# Altium PCB lab2_arhipov_buck.PcbDoc
Units mm, origin at the board's own origin, x right, y up, seen from the top; angles counter-clockwise.
Board outline 63 x 24.9 mm, 4 copper layers (Top Layer, Signal Layer 1, Signal Layer 2, Bottom Layer), stack 1.522 mm thick; 32 components, 16 nets, 82 pads, 15 vias.
Unrouted connection lines stored in the file: 13.
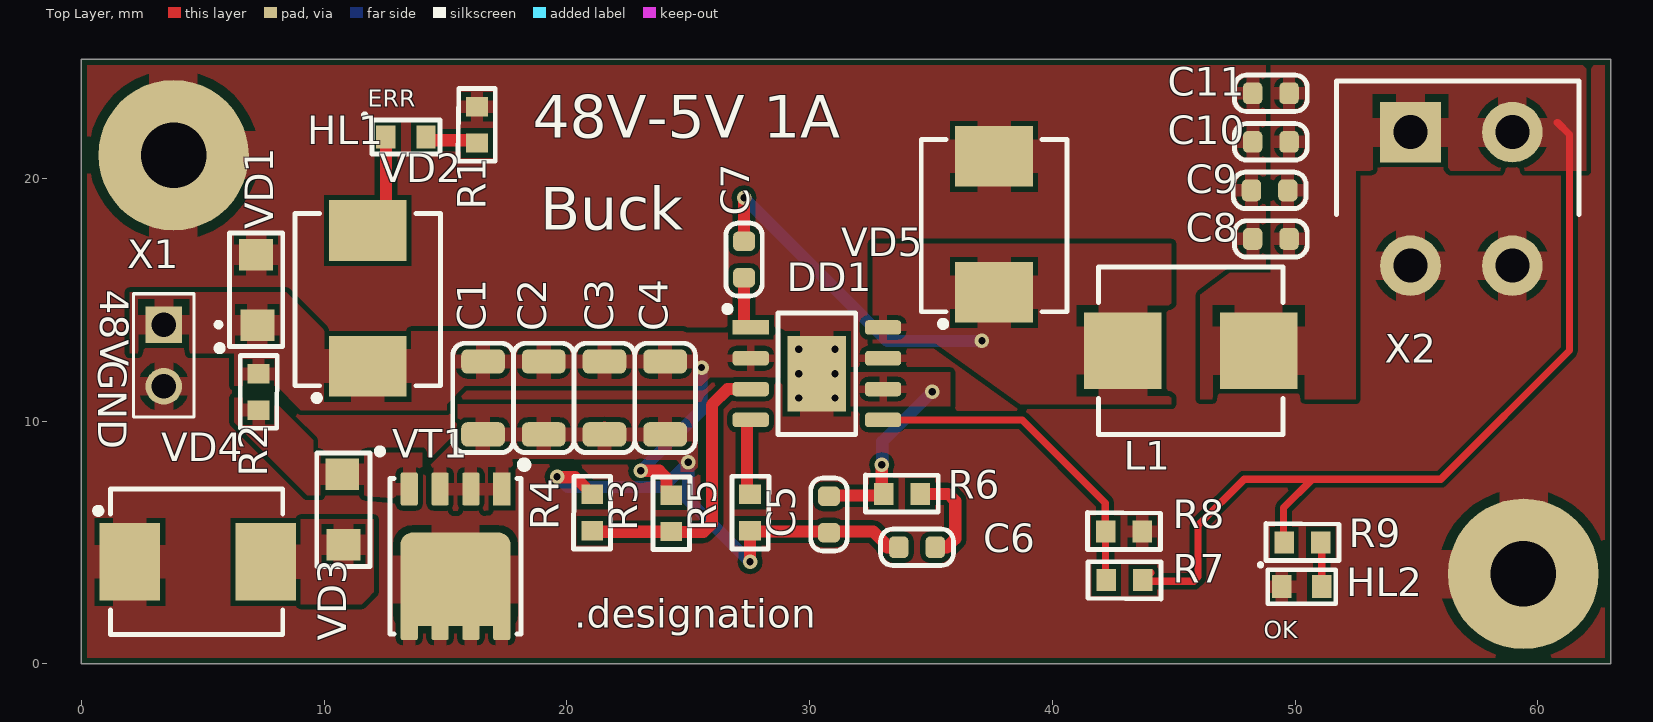
[diagram p0: Top Layer view]
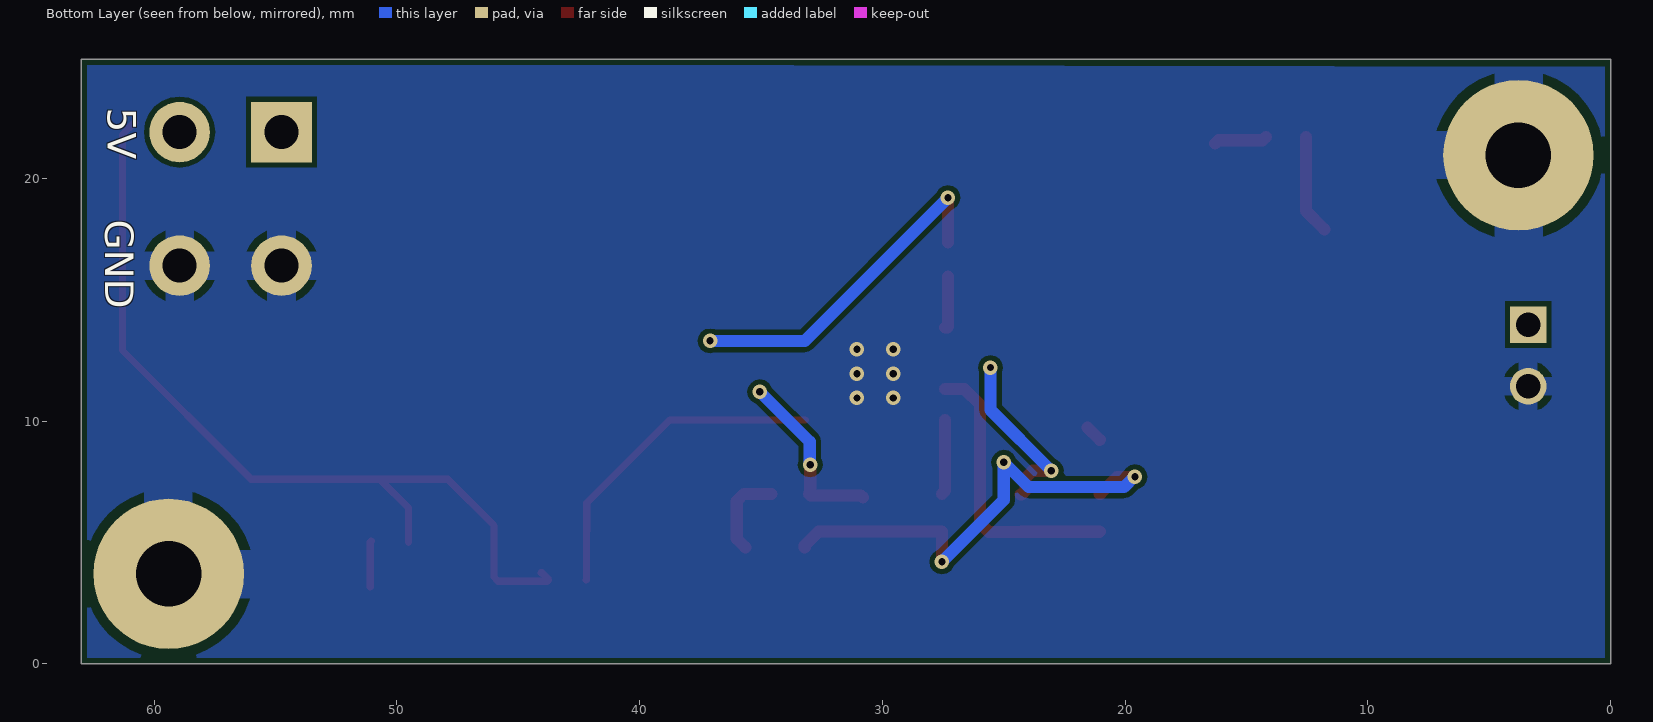
[diagram p1: Bottom Layer view, seen from below]
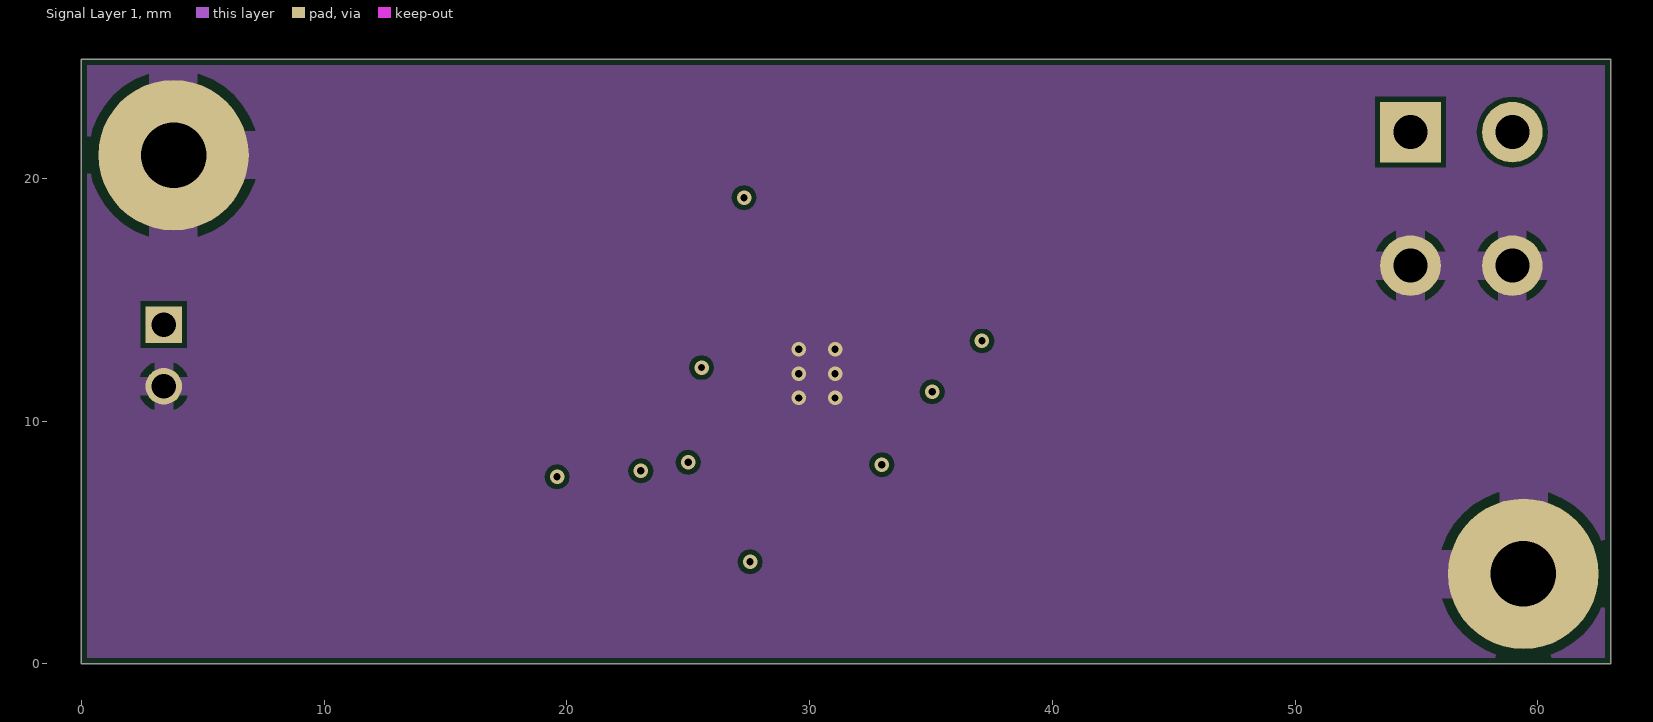
[diagram p2: Signal Layer 1]
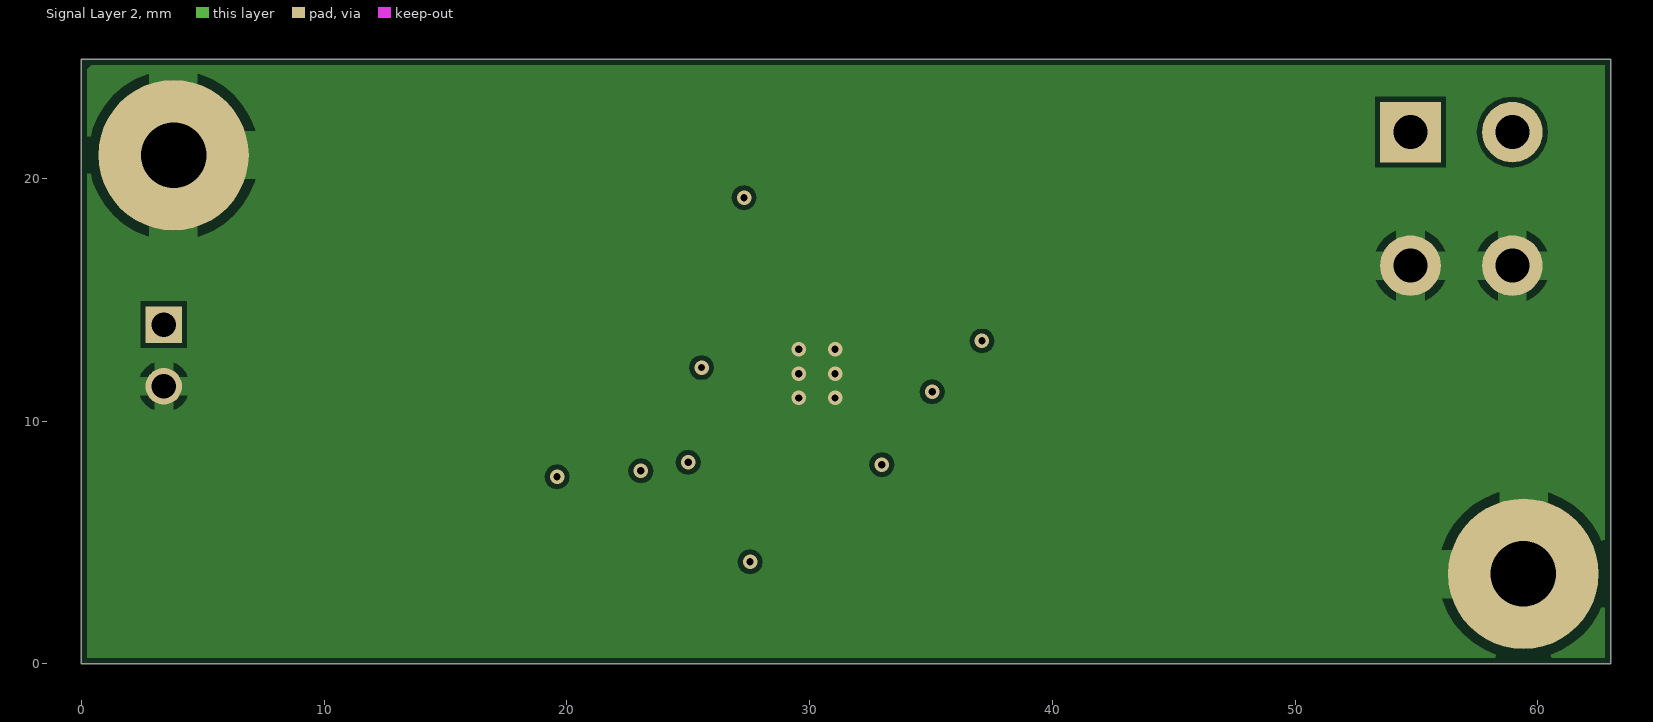
[diagram p3: Signal Layer 2]
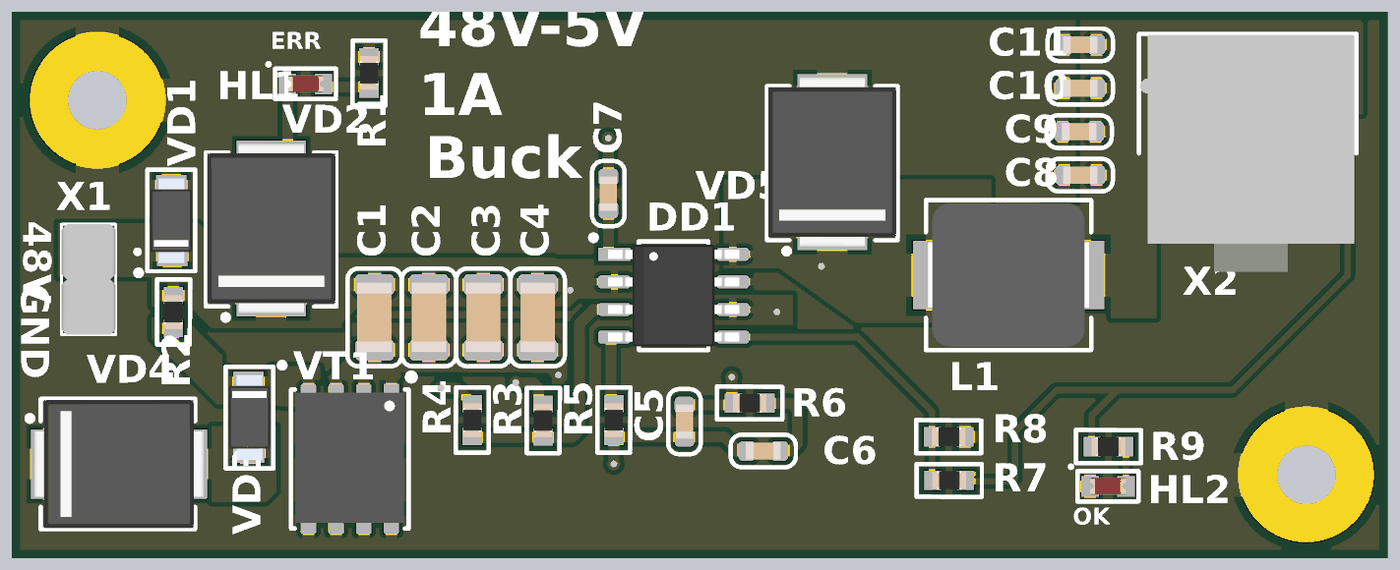
[diagram p4: 3D render of the assembled board from above, using the file's embedded part models]

## Layer stack, top to bottom
Top Solder: solder mask 0.0102, Solder Resist, Dk 3.5
Top Layer: signal copper 0.018
Prepreg 1: prepreg 0.125, FR4 HiTg170, Dk 5.07
Signal Layer 1: signal copper 0.018
Core 1: core 1.2, FR4, Dk 4.6
Signal Layer 2: signal copper 0.018
Prepreg 2: prepreg 0.125, FR4 HiTg170, Dk 5.07
Bottom Layer: signal copper 0.018
Bottom Solder: solder mask 0.0102, Solder Resist, Dk 3.5

## Board outline
0,0 0,24.9 63,24.9 63,0

## Design rules (kind name [scope] priority, off if disabled: settings)
AcuteAngle min_acute_angle [OnCopper] p1: minimum=3.50000000000000E+0001 checktracksonly=FALSE // Минимальный угол между примитивами топологии
BoardOutlineClearance board_outline_clearance_std [NOT (OnLayer('Bottom Overlay') OR OnLayer('Top Overlay'))] p1: gap=0.25 ignorepadtopadclearanceinfootprint=FALSE except(0: Arc-SplitContinuation Track-SplitContinuation SMDPad-SplitContinuation THPad-SplitContinuation Via-SplitContinuation Fill-SplitContinuation Poly-SplitContinuation Region-SplitContinuation Text-SplitContinuation) // Отступ элементов топологии от края фрезеруемой печатной платы
Clearance clearance_outer_18um_std [OnTopLayer OR OnBottomLayer] p1: gap=0.125 ignorepadtopadclearanceinfootprint=TRUE except(0.2: Arc-Fill Arc-Poly Track-Fill Track-Poly SMDPad-SMDPad SMDPad-Fill SMDPad-Poly THPad-Fill THPad-Poly Via-Fill Via-Poly Fill-Fill Fill-Poly Poly-Poly Poly-Region Poly-Text; 0.25: Arc-Hole Track-Hole SMDPad-Hole THPad-Hole Via-Hole Fill-Hole Poly-Hole Region-Hole Text-Hole) // Зазоры на внешних слоях
Clearance clearance_inner_18um_std [NOT (OnTopLayer Or OnBottomLayer)] p2: gap=0.125 ignorepadtopadclearanceinfootprint=FALSE except(0.2: Arc-Fill Arc-Poly Track-Fill Track-Poly SMDPad-SMDPad SMDPad-Fill SMDPad-Poly THPad-Fill THPad-Poly Via-Fill Via-Poly Fill-Fill Fill-Poly Poly-Poly Poly-Region Poly-Text; 0.25: Arc-Hole Track-Hole SMDPad-Hole THPad-Hole Via-Hole Fill-Hole Poly-Hole Region-Hole Text-Hole) // Зазоры на внутренних слоях
ComponentClearance [All] p1: gap=0 collisioncheckmode=3 verticalgap=0 showdistances=FALSE
DiffPairsRouting diff_pairs_routing [All] p1: maxlimit=0.254 minlimit=0.127 mostfreqgap=0.254 toplayer_maxgap=0.127 toplayer_prefgap=0.127 toplayer_minwidth=0.143 toplayer_maxwidth=0.143 toplayer_prefwidth=0.143 midlayer1_minwidth=0.381 midlayer1_maxwidth=0.381 midlayer1_prefwidth=0.381 midlayer2_minwidth=0.381 midlayer2_maxwidth=0.381 midlayer2_prefwidth=0.381 bottomlayer_maxgap=0.127 bottomlayer_prefgap=0.127 bottomlayer_minwidth=0.143 bottomlayer_maxwidth=0.143 bottomlayer_prefwidth=0.143 impedanceprofiledriven=TRUE impedanceprofileid={FD46899E-B5A2-4EF5-A302-5D2DB6A51F35} maxuncoupledlength=12.7 // Правила трассировки дифференциальных пар
HoleSize min_hole_size_std [IsPad] p1: absolutevalues=TRUE maxlimit=5.9 minlimit=0.6 maxpercent=80.000 minpercent=20.000 // Диаметр межслойного переходного отверстия
HoleSize min_hole_size_via_std [IsVia] p2: absolutevalues=TRUE maxlimit=5.9 minlimit=0.3 maxpercent=80.000 minpercent=20.000 // Минимальный диаметр монтажного отверстия
HoleToHoleClearance hole_to_hole_clearance_std [All] p1: gap=0.2 allowstackedmicrovias=FALSE // Минимальное расстояние между краями двух отверстий
MinimumAnnularRing min_via_ar_std [All] p1: minimumring=0.15 // Поясок площадки переходного отверстия (Annular ring VIA)
MinimumAnnularRing min_pad_ar_std [All] p2: minimumring=0.2 // Поясок монтажной контактной площадки (Annular ring PAD)
MinimumSolderMaskSliver min_solder_mask_bridge_std [All] p1: minsoldermaskwidth=0.15 // Мнимальная ширина масочного мостика
PlaneClearance plane_clearance_18um_std [All] p1: clearance=0.2 // Отступ полигона (для слоя plane) от элементов топологии
PlaneConnect [All] p1: planeconnectstyle=Relief reliefexpansion=0.5 reliefentries=4 reliefconductorwidth=0.2 reliefairgap=0.2
PolygonConnect poly_connect_to_pad<=0.3 [(AsMM(PadXSize_AllLayers)<=0.301) or (AsMM(PadYSize_AllLayers)<=0.301)] p1: thpad.connectstyle=Relief thpad.reliefconductorwidth=0.2 thpad.reliefentries=4 thpad.polygonreliefangle="90 Angle" thpad.airgapwidth=0.2 smdpad.connectstyle=Relief smdpad.reliefconductorwidth=0.2 smdpad.reliefentries=4 smdpad.polygonreliefangle="90 Angle" smdpad.airgapwidth=0.2 via.connectstyle=Direct via.reliefconductorwidth=0.254 via.reliefentries=4 via.polygonreliefangle="90 Angle" via.airgapwidth=0.254 // Правила подключения полигонов для падов от 0,3мм и меньше
PolygonConnect poly_connect_to_pad<=0.4 [(AsMM(PadXSize_AllLayers)<=0.401) or (AsMM(PadYSize_AllLayers)<=0.401)] p2: thpad.connectstyle=Relief thpad.reliefconductorwidth=0.26 thpad.reliefentries=4 thpad.polygonreliefangle="90 Angle" thpad.airgapwidth=0.2 smdpad.connectstyle=Relief smdpad.reliefconductorwidth=0.26 smdpad.reliefentries=4 smdpad.polygonreliefangle="90 Angle" smdpad.airgapwidth=0.2 via.connectstyle=Direct via.reliefconductorwidth=0.254 via.reliefentries=4 via.polygonreliefangle="90 Angle" via.airgapwidth=0.254 // Правила подключения полигонов для падов от 0,4 и меньше
PolygonConnect poly_connect_to_pad<=0.6 [(AsMM(PadXSize_AllLayers)<=0.601) or (AsMM(PadYSize_AllLayers)<=0.601)] p3: thpad.connectstyle=Relief thpad.reliefconductorwidth=0.33 thpad.reliefentries=4 thpad.polygonreliefangle="90 Angle" thpad.airgapwidth=0.2 smdpad.connectstyle=Relief smdpad.reliefconductorwidth=0.33 smdpad.reliefentries=4 smdpad.polygonreliefangle="90 Angle" smdpad.airgapwidth=0.2 via.connectstyle=Direct via.reliefconductorwidth=0.254 via.reliefentries=4 via.polygonreliefangle="90 Angle" via.airgapwidth=0.254 // Правила подключения полигонов для падов от 0,6мм и меньше
PolygonConnect poly_connect_to_pad<=0.7 [(AsMM(PadXSize_AllLayers)<=0.701) or (AsMM(PadYSize_AllLayers)<=0.701)] p4: thpad.connectstyle=Relief thpad.reliefconductorwidth=0.46 thpad.reliefentries=4 thpad.polygonreliefangle="90 Angle" thpad.airgapwidth=0.2 smdpad.connectstyle=Relief smdpad.reliefconductorwidth=0.46 smdpad.reliefentries=4 smdpad.polygonreliefangle="90 Angle" smdpad.airgapwidth=0.2 via.connectstyle=Direct via.reliefconductorwidth=0.254 via.reliefentries=4 via.polygonreliefangle="90 Angle" via.airgapwidth=0.254 // Правила подключения полигонов для падов от 0,7мм и меньше
PolygonConnect poly_connect_to_pad<=0.8 [(AsMM(PadXSize_AllLayers)<=0.8)or(AsMM(PadYSize_AllLayers)<=0.8)] p5: thpad.connectstyle=Relief thpad.reliefconductorwidth=0.53 thpad.reliefentries=4 thpad.polygonreliefangle="90 Angle" thpad.airgapwidth=0.3 smdpad.connectstyle=Relief smdpad.reliefconductorwidth=0.53 smdpad.reliefentries=4 smdpad.polygonreliefangle="90 Angle" smdpad.airgapwidth=0.2 via.connectstyle=Direct via.reliefconductorwidth=0.254 via.reliefentries=4 via.polygonreliefangle="90 Angle" via.airgapwidth=0.254 // Правила подключения полигонов для падов от 0,8мм и меньше
PolygonConnect poly_connect_to_pad<=1 [(AsMM(PadXSize_AllLayers)<=1.01)or(AsMM(PadYSize_AllLayers)<=1.01)] p6: thpad.connectstyle=Relief thpad.reliefconductorwidth=0.6 thpad.reliefentries=4 thpad.polygonreliefangle="90 Angle" thpad.airgapwidth=0.3 smdpad.connectstyle=Relief smdpad.reliefconductorwidth=0.6 smdpad.reliefentries=4 smdpad.polygonreliefangle="90 Angle" smdpad.airgapwidth=0.2 via.connectstyle=Direct via.reliefconductorwidth=0.254 via.reliefentries=4 via.polygonreliefangle="90 Angle" via.airgapwidth=0.254 // Правила подключения полигонов для падов от 1мм и меньше
PolygonConnect poly_connect_to_pad<=1.3 [(AsMM(PadXSize_AllLayers)<=1.31)or(AsMM(PadYSize_AllLayers)<=1.31)] p7: thpad.connectstyle=Relief thpad.reliefconductorwidth=0.66 thpad.reliefentries=4 thpad.polygonreliefangle="90 Angle" thpad.airgapwidth=0.3 smdpad.connectstyle=Relief smdpad.reliefconductorwidth=0.86 smdpad.reliefentries=4 smdpad.polygonreliefangle="90 Angle" smdpad.airgapwidth=0.2 via.connectstyle=Direct via.reliefconductorwidth=0.254 via.reliefentries=4 via.polygonreliefangle="90 Angle" via.airgapwidth=0.254 // Правила подключения полигонов для падов от 1,3мм и меньше
PolygonConnect poly_connect_to_pad<=1.6 [(AsMM(PadXSize_AllLayers)<=1.61)or(AsMM(PadYSize_AllLayers)<=1.61)] p8: thpad.connectstyle=Relief thpad.reliefconductorwidth=0.8 thpad.reliefentries=4 thpad.polygonreliefangle="90 Angle" thpad.airgapwidth=0.3 smdpad.connectstyle=Relief smdpad.reliefconductorwidth=1 smdpad.reliefentries=4 smdpad.polygonreliefangle="90 Angle" smdpad.airgapwidth=0.2 via.connectstyle=Direct via.reliefconductorwidth=0.254 via.reliefentries=4 via.polygonreliefangle="90 Angle" via.airgapwidth=0.254 // Правила подключения полигонов для падов от 1,6мм и меньше
PolygonConnect poly_connect_to_pad<=1.8 [(AsMM(PadXSize_AllLayers)<=1.8)or(AsMM(PadYSize_AllLayers)<=1.8)] p9: thpad.connectstyle=Relief thpad.reliefconductorwidth=1 thpad.reliefentries=4 thpad.polygonreliefangle="90 Angle" thpad.airgapwidth=0.3 smdpad.connectstyle=Relief smdpad.reliefconductorwidth=1.2 smdpad.reliefentries=4 smdpad.polygonreliefangle="90 Angle" smdpad.airgapwidth=0.2 via.connectstyle=Direct via.reliefconductorwidth=0.254 via.reliefentries=4 via.polygonreliefangle="90 Angle" via.airgapwidth=0.254 // Правила подключения полигонов для падов от 1,8мм и меньше
PolygonConnect poly_connect_to_pad<=2 [(AsMM(PadXSize_AllLayers)<=2.01)or(AsMM(PadYSize_AllLayers)<=2.01)] p10: thpad.connectstyle=Relief thpad.reliefconductorwidth=1.1 thpad.reliefentries=4 thpad.polygonreliefangle="90 Angle" thpad.airgapwidth=0.3 smdpad.connectstyle=Relief smdpad.reliefconductorwidth=1.4 smdpad.reliefentries=4 smdpad.polygonreliefangle="90 Angle" smdpad.airgapwidth=0.2 via.connectstyle=Direct via.reliefconductorwidth=0.254 via.reliefentries=4 via.polygonreliefangle="90 Angle" via.airgapwidth=0.254 // Правила подключения полигонов для падов от 2мм и меньше
PolygonConnect poly_connect_to_pad<=2.3 [(AsMM(PadXSize_AllLayers)<=2.31)or(AsMM(PadYSize_AllLayers)<=2.31)] p11: thpad.connectstyle=Relief thpad.reliefconductorwidth=1.2 thpad.reliefentries=4 thpad.polygonreliefangle="90 Angle" thpad.airgapwidth=0.3 smdpad.connectstyle=Relief smdpad.reliefconductorwidth=1.4 smdpad.reliefentries=4 smdpad.polygonreliefangle="90 Angle" smdpad.airgapwidth=0.2 via.connectstyle=Direct via.reliefconductorwidth=0.254 via.reliefentries=4 via.polygonreliefangle="90 Angle" via.airgapwidth=0.254 // Правила подключения полигонов для падов от 2,3мм и меньше
PolygonConnect poly_connect_to_pad<=2.5 [(AsMM(PadXSize_AllLayers)<=2.51)or(AsMM(PadYSize_AllLayers)<=2.51)] p12: thpad.connectstyle=Relief thpad.reliefconductorwidth=1.2 thpad.reliefentries=4 thpad.polygonreliefangle="90 Angle" thpad.airgapwidth=0.3 smdpad.connectstyle=Relief smdpad.reliefconductorwidth=1.4 smdpad.reliefentries=4 smdpad.polygonreliefangle="90 Angle" smdpad.airgapwidth=0.2 via.connectstyle=Direct via.reliefconductorwidth=0.254 via.reliefentries=4 via.polygonreliefangle="90 Angle" via.airgapwidth=0.254 // Правила подключения полигонов для падов от 2,5мм и меньше
PolygonConnect poly_connect_to_pad<=2.7 [(AsMM(PadXSize_AllLayers)<=2.71)or(AsMM(PadYSize_AllLayers)<=2.71)] p13: thpad.connectstyle=Relief thpad.reliefconductorwidth=1.4 thpad.reliefentries=4 thpad.polygonreliefangle="90 Angle" thpad.airgapwidth=0.3 smdpad.connectstyle=Relief smdpad.reliefconductorwidth=1.6 smdpad.reliefentries=4 smdpad.polygonreliefangle="90 Angle" smdpad.airgapwidth=0.2 via.connectstyle=Direct via.reliefconductorwidth=0.254 via.reliefentries=4 via.polygonreliefangle="90 Angle" via.airgapwidth=0.254 // Правила подключения полигонов для падов от 2,7мм и меньше
PolygonConnect poly_connect_to_pad<=3 [(AsMM(PadXSize_AllLayers)<=3.01)or(AsMM(PadYSize_AllLayers)<=3.01)] p14: thpad.connectstyle=Relief thpad.reliefconductorwidth=1.6 thpad.reliefentries=4 thpad.polygonreliefangle="90 Angle" thpad.airgapwidth=0.3 smdpad.connectstyle=Relief smdpad.reliefconductorwidth=1.8 smdpad.reliefentries=4 smdpad.polygonreliefangle="90 Angle" smdpad.airgapwidth=0.2 via.connectstyle=Direct via.reliefconductorwidth=0.254 via.reliefentries=4 via.polygonreliefangle="90 Angle" via.airgapwidth=0.254 // Правила подключения полигонов для падов от 3мм и меньше
PolygonConnect poly_connect_to_pad<=7 [(AsMM(PadXSize_AllLayers)<7.01)or(AsMM(PadYSize_AllLayers)<=7.01)] p15: thpad.connectstyle=Relief thpad.reliefconductorwidth=2 thpad.reliefentries=4 thpad.polygonreliefangle="90 Angle" thpad.airgapwidth=0.4 smdpad.connectstyle=Relief smdpad.reliefconductorwidth=2 smdpad.reliefentries=4 smdpad.polygonreliefangle="90 Angle" smdpad.airgapwidth=0.3 via.connectstyle=Direct via.reliefconductorwidth=0.254 via.reliefentries=4 via.polygonreliefangle="90 Angle" via.airgapwidth=0.254 // Правила подключения полигонов для падов от 7мм и меньше
PolygonConnect poly_connect_to_pad [All] p16: thpad.connectstyle=Relief thpad.reliefconductorwidth=0.25 thpad.reliefentries=4 thpad.polygonreliefangle="90 Angle" thpad.airgapwidth=0.2 smdpad.connectstyle=Relief smdpad.reliefconductorwidth=0.25 smdpad.reliefentries=4 smdpad.polygonreliefangle="90 Angle" smdpad.airgapwidth=0.2 via.connectstyle=Direct via.reliefconductorwidth=0.25 via.reliefentries=4 via.polygonreliefangle="90 Angle" via.airgapwidth=0.2 // Правила подключения полигонов общие
RoutingCorners [All] p1 off: cornerstyle=45-Degree minsetback=2.5 maxsetback=2.5
RoutingVias [All] p1: holewidth=0.3 width=0.6 viastyle="Through Hole" minholewidth=0.3 minwidth=0.6 maxholewidth=5.9 maxwidth=6.4
SilkToSilkClearance silk_to_silk_clearance_std [All] p1 off: silktosilkclearance=0.15 // Отступ текста шелкографии от других примитивов шелкографии
SilkToSolderMaskClearance silk_to_solder_mask_clearance_std [IsPad] p1 off: minsilkscreentomaskgap=0.15 clearancetoexposedcopper=FALSE // Минимальное расстояние между элементами шелкографии и вскрытой медью
SolderMaskExpansion solder_mask_expansion_std [All] p1: expansion=0.05 // Припуск паяльной масски
UnRoutedNet [All] p1: checkbadconnections=TRUE
Width width_18um_std [All] p1: maxlimit=10 minlimit=0.125 preferedwidth=0.15 checkconnectedcopper=TRUE // Ширина проводников (общая)
19 further rules are at their usual default settings.

## Components (designator, comment, footprint, x,y, rotation, side; value= is the part's Value field where it differs from the comment)
C1 "2,2 мк" C1206 16.55,10.95 r270 top
C2 "2,2 мк" C1206 19.05,10.95 r270 top
C3 "2,2 мк" C1206 21.55,10.95 r270 top
C4 "2,2 мк" C1206 24.05,10.95 r270 top
C5 "100" C0603 30.8,6.15 r270 top
C6 "0,033 мк" C0603 34.425,4.8 r180 top
C7 "0,1 мк" C0603 27.3,16.65 r90 top
C8 "22 мк" C0603 49,17.5 r180 top
C9 "22 мк" C0603 48.95,19.5 r180 top
C10 "22 мк" C0603 49,21.5 r180 top
C11 "22 мк" C0603 49,23.5 r180 top
DD1 "TPS54560BDDA" HSOP-8 30.3,11.95 r0 top
HL1 "TLMS1000-GS08" HL0603 13.375,21.7 r0 top
HL2 "TLMS1000-GS08" HL0603 50.275,3.175 r0 top
L1 "SRP7028A-220M" SRP-2-670X660X280 45.7,12.9 r0 top
R1 "3,3 к" R0603 16.3,22.2 r270 top
R2 "680" R0603 7.3,11.2 r90 top
R3 "147 к" R0603 24.3,6.2 r90 top
R4 "4,42 к" R0603 21.05,6.225 r270 top
R5 "97,6 к" R0603 27.55,6.225 r90 top
R6 "3,6 к" R0603 33.8,7 r180 top
R7 "53,6 к" R0603 42.975,3.45 r0 top
R8 "10,2 к" R0603 42.95,5.45 r180 top
R9 "220" R0603 50.3,5 r180 top
VD1 "BZD17C47P" DO-219AB 7.2,15.4 r90 top
VD2 "SS36-E3/57T" DO-214AB 11.8,15.05 r90 top
VD3 "BZD17C15P" DO-219AB 10.8,6.35 r270 top
VD4 "SS36-E3/57T" DO-214AB 4.8,4.2 r0 top
VD5 "SS36-E3/57T" DO-214AB 37.6,18.1 r90 top
VT1 "CSD19532Q5B" SON-8 15.415,4.43 r180 top
X1 "826629-2" TE_826629-2 3.4,12.7 r270 top
X2 "4-1775099-0" 4-1775099-0 56.7,18.5 r0 top

## Footprints (in the part's own frame and the unit in brackets; to place one, negate y for a bottom-side part, rotate by r counter-clockwise, add the part's x,y. Pads: shape width x height; smd on the part's side, far side on the other; paste and mask are expansions set on the pad)
4-1775099-0 [mm]
  rect 2.5x2.5 hole 1.4: 1(-1.95,3.4)
  round 2.5 hole 1.4: 2(2.25,3.4) 3(-1.95,-2.1) 4(2.25,-2.1)
  silkscreen extent -5,0 5,5.5, body extent -4.95,-5.45 4.9,5.45, height 12.8
C0603 [mm] "Chip Capacitor, 2-Leads, Body 1,60x0,80mm, IPC Medium Density"
  rrect50% 0.8x0.9 smd: 1(-0.75,0) 2(0.75,0)
  silkscreen extent -1.5,-0.75 1.5,0.75, body extent -0.8,-0.4 0.8,0.4, height 0.8
C1206 [mm] "Chip Capacitor, 2-Leads, Body 3,20x1,60mm, IPC Medium Density"
  rrect50% 1x1.8 smd: 1(-1.5,0) 2(1.5,0)
  silkscreen extent -2.25,-1.25 2.25,1.25, body extent -1.6,-0.8 1.6,0.8, height 0.78
DO-214AB [mm] "Molded Diode, 2-Leads, Body 7,94x5,91mm, IPC Medium Density"
  rect 2.5x3.2 smd: 1(-2.8,0) 2(2.8,0)
  silkscreen extent -4.22,-3 3.5,3, body extent -3.95,-2.95 3.95,2.95, height 2.59
DO-219AB [mm]
  rect 1.3x1.4 smd: 1(-1.45,-0.05) 2(1.45,0)
  silkscreen extent -2.45,-1.1 2.35,1.55, body extent -1.95,-0.95 1.95,0.95, height 1.25
HL0603 [mm] "Chip Diode, 2-Leads, Body 1,60x0,80mm, IPC Medium Density"
  rect 0.8x0.95 smd: 1(-0.825,0) 2(0.825,0)
  silkscreen extent -1.75,-0.7 1.4,0.95, body extent -0.81,-0.4 0.81,0.4, height 0.6
HSOP-8 [mm] "SOP, 8-Leads, Body 4,90x3,90mm, Pitch 1,27mm, Thermal Pad 3,10x2,40mm, IPC Medium Density"
  rect 2.4x3.1 smd: 0(0,0)
  rect 1.5x0.6 smd: 1(-2.725,1.905)
  rrect50% 1.5x0.6 smd: 2(-2.725,0.635) 3(-2.725,-0.635) 4(-2.725,-1.905) 5(2.725,-1.905) 6(2.725,-0.635) 7(2.725,0.635) 8(2.725,1.905)
  silkscreen extent -3.81,-2.5 1.6,2.79, body extent -3.01,-2.35 3.01,2.35, height 1.7
R0603 [mm] "Chip Resistor, 2-Leads, Body 1,60x0,80mm, IPC Medium Density"
  rect 0.8x0.9 smd: 1(-0.75,0) 2(0.75,0)
  silkscreen extent -1.5,-0.77 1.5,0.75, body extent -0.77,-0.43 0.78,0.43, height 0.43
SON-8 [mm]
  rrect25% 0.71x1.372 smd paste-10: D(-1.905,2.77) D(-0.635,2.77) D(0.635,2.77) D(1.905,2.77)
  rrect25% 4.52x3.85 smd paste-10: D(0,0.95)
  rrect25% 0.71x1.372 smd paste-0.002: G(1.905,-2.77) S(-0.635,-2.77) S(0.635,-2.77)
  rect 0.71x1.372 smd paste-0.002: S(-1.905,-2.77)
  silkscreen extent -2.83,-3.78 2.7,3.2, body extent -2.48,-3.05 2.52,2.95, height 1.05
SRP-2-670X660X280 [mm] "Precision Wire Wound Inductor, 2-Leads, Body 7,30x6,60mm, IPC Medium Density"
  rect 3.2x3.15 smd: 1(-2.8,0) 2(2.8,0)
  silkscreen extent -3.8,-3.45 3.8,3.45, body extent -3.7,-3.3 3.7,3.3, height 3
TE_826629-2 [mm]
  rect 1.508x1.508 hole 1: 1(-1.27,0)
  round 1.508 hole 1: 2(1.27,0)
  silkscreen extent -2.54,-1.25 2.54,2.35, body extent -2.54,-1.25 2.54,1.25, height 9.49

## Part data
C1 C2 C3 C4: library part c0078, "=Описание", HelpURL=https://www.yageo.com/upload/media/product/productsearch/datasheet/mlcc/UPY-NP0X7R_MV_100-to-630V_22.pdf, ID=c0078, Корпус=1206, Наименование=CC1206KKX7R0BB225, Напряжение="100 В", Номинал="2,2 мк", Номинальное напряжение="100 В", Описание="Конденсатор чип 1206 2,2 мкФ 100 В ±10 %", Отклонение="±10 %", Производитель="YAGEO Corp.", Рабочие температуры="от –55 °С до +125 °С", Температурный коэффициент емкости=X7R, Фамилия=Ларионов
C5: library part c0044, "=Описание", HelpURL=https://www.murata.com/en-eu/products/productdetail?partno=GRM1885C1H101JA01%23, ID=c0044, Корпус=0603, Наименование=GRM1885C1H101JA01D, Напряжение="50 В", Номинал=100, Номинальное напряжение="50 В", Описание="Конденсатор чип 0603 100 пФ 50 В ±5 %", Отклонение="±5 %", Производитель="Murata Manufacturing Co., Ltd.", Рабочие температуры="от -55 °С до +125 °С", Фамилия=Архипов
C6: library part c0027, "=Описание", HelpURL=https://www.yageo.com/upload/media/product/productsearch/datasheet/mlcc/UPY-GPHC_X7R_6.3V-to-50V_20.pdf, ID=c0027, Корпус=0603, Наименование=CC0603JPX7R7BB333, Напряжение="16 В", Номинал="0,033 мк", Номинальное напряжение="16 В", Описание="Конденсатор чип 0603 33 нФ 16 В ±5 %", Отклонение="±5 %", Производитель="YAGEO Corp.", Рабочие температуры="от –55 °С до +125 °С", Температурный коэффициент емкости=X7R, Фамилия=Ларионов
C7: library part c0018, "=Описание", HelpURL=https://www.yageo.com/upload/media/product/products/datasheet/mlcc/UPY-GPHC_X7R_6.3V-to-50V_20.pdf, ID=c0018, Корпус=0603, Наименование=CC0603JRX7R9BB104, Напряжение="50 В", Номинал="0,1 мк", Номинальное напряжение="50 В", Описание="Конденсатор чип 0603 0,1 мкФ 50 В ±5 %", Отклонение="±5 %", Производитель="YAGEO Corp.", Рабочие температуры="от -55 °С до +125 °С", Фамилия=Ларионов
C8 C9 C10 C11: library part c0101, "=Описание", HelpURL=https://www.yageo.com/upload/media/product/productsearch/datasheet/mlcc/UPY-GPHC_X5R_4V-to-50V_26.pdf, ID=c0101, Корпус=0603, Наименование=CC0603MPX5R6BB226, Напряжение="10 В", Номинал="22 мк", Номинальное напряжение="10 В", Описание="Конденсатор чип 0603 22 мкФ 10 В ±20 %", Отклонение="±20 %", Производитель="YAGEO Corp.", Рабочие температуры="от –55 °С до +85 °С", Температурный коэффициент емкости=X5R, Фамилия=Чернов
DD1: library part dd0009, "=Описание", HelpURL=https://www.ti.com/product/TPS54560B, ID=dd0009, Входное напряжение="от 4,5 В до 60 В", Выходное напряжение="от 1 В до 58,8 В", Коммутируемый ток="от 0 А до 5 А", Корпус=HSOP-8, Наименование=TPS54560BDDA, Описание="Понижающий преобразователь напряжения 60 В и 5 А", Производитель="Texas Instruments", Рабочие температуры="от –40 °С до +150 °С", Фамилия=Архипов, Частота переключения="от 100 кГц до 2,5 МГц"
HL1 HL2: library part hl0001, "=Описание", HelpURL=https://www.vishay.com/leds/list/product-83172/, ID=hl0001, Корпус=0603, Наименование=TLMS1000-GS08, Номинальная длина волны="628 нм", Номинальная сила света="4 мкд", Номинальное падение напряжения="1,8 В", Номинальный прямой ток="15 мА", Описание="Светодиод чип 0603 красный", Производитель="Vishay Intertechnology, Inc.", Рабочие температуры="от -40 °С до +100 °С", Рассеиваемая мощность="40 мВт", Фамилия=Ларионов, Цвет=Red
L1: library part l0006, "=Описание", HelpURL=https://www.bourns.com/products/magnetic-products/power-inductors-aec-q200-compliant/product/SRP7028A, ID=l0006, Индуктивность="22 мкГн", Корпус="6,7 x 6,6 x 2,8", Максимальное активное сопротивление="190 мОм", Наименование=SRP7028A-220M, Номинал="22 мкГн", Номинальное активное сопротивление="165 мОм", Номинальный ток (при нагреве на 20 °С/40 °С)="2 А", Описание="Катушка индуктивности 22 мкГн ±20 %", Отклонение="±20 %", Производитель="Bourns, Inc.", Рабочее напряжение="не указано", Рабочие температуры="от –55 °С до +150 °С", Резонансная частота="10 МГц", Ток насыщения="3,5 А", Фамилия=Ларионов
R1: library part r0025, "=Описание", HelpURL=https://www.yageo.com/upload/media/product/productsearch/datasheet/rchip/PYu-RC_Group_51_RoHS_L_11.pdf, ID=r0025, Корпус=0603, Наименование=RC0603FR-073K3L, Номинал="3,3 к", Номинальное напряжение="75 В", Номинальный ток="1 А", Описание="Резистор чип 0603 3,3 кОм ±1 % 0,1 Вт", Отклонение="±1 %", Производитель="YAGEO Corp.", Рабочие температуры="от -55 °С до +155 °С", Фамилия=Паньков
R2: library part r0028, "=Описание", HelpURL=https://www.yageo.com/upload/media/product/productsearch/datasheet/rchip/PYu-RC_Group_51_RoHS_L_11.pdf, ID=r0028, Корпус=0603, Наименование=RC0603JR-07680RL, Номинал=680, Номинальное напряжение="75 В", Номинальный ток="1 А", Описание="Резистор чип 0603 680 Ом ±1 % 0,1 Вт", Отклонение="±1 %", Производитель="YAGEO Corp.", Рабочие температуры="от –55 °С до +155 °С", Фамилия=Архипов
R3: library part r0102, "=Описание", HelpURL=https://www.yageo.com/upload/media/product/productsearch/datasheet/rchip/PYu-RC_Group_51_RoHS_L_11.pdf, ID=r0102, Корпус=0603, Наименование=RC0603FR-07147KL, Номинал="147 к", Номинальное напряжение="75 В", Номинальный ток="1 А", Описание="Резистор чип 0603 147 кОм ±1 % 0,1 Вт", Отклонение="±1 %", Производитель="YAGEO Corp.", Рабочие температуры="от –55 °С до +155 °С", Фамилия=Жернаков
R4: library part r0015, "=Описание", HelpURL=https://www.yageo.com/upload/media/product/productsearch/datasheet/rchip/PYu-RC_Group_51_RoHS_L_11.pdf, ID=r0015, Корпус=0603, Наименование=RC0603FR-074K42L, Номинал="4,42 к", Номинальное напряжение="75 В", Номинальный ток="1 А", Описание="Резистор чип 0603 4,42 кОм ±1 % 0,1 Вт", Отклонение="±1 %", Производитель="YAGEO Corp.", Рабочие температуры="от -55 °С до +155 °С", Фамилия=Жернаков
R5: library part r0029, "=Описание", HelpURL=https://www.yageo.com/upload/media/product/productsearch/datasheet/rchip/PYu-RC_Group_51_RoHS_L_11.pdf, ID=r0029, Корпус=0603, Наименование=RC0603FR-0797K6L, Номинал="97,6 к", Номинальное напряжение="75 В", Номинальный ток="1 А", Описание="Резистор чип 0603 97,6 кОм ±1 % 0,1 Вт", Отклонение="±1 %", Производитель="YAGEO Corp.", Рабочие температуры="от -55 °С до +155 °С", Фамилия=Водорезов
R6: library part r0026, "=Описание", HelpURL=https://www.yageo.com/upload/media/product/productsearch/datasheet/rchip/PYu-RC_Group_51_RoHS_L_11.pdf, ID=r0026, Корпус=0603, Наименование=RC0603FR-073K6L, Номинал="3,6 к", Номинальное напряжение="75 В", Номинальный ток="1 А", Описание="Резистор чип 0603 3,6 кОм ±1 % 0,1 Вт", Отклонение="±1 %", Производитель="YAGEO Corp.", Рабочие температуры="от -55 °С до +155 °С", Фамилия=Паньков
R7: library part r0017, "=Описание", HelpURL=https://www.yageo.com/upload/media/product/productsearch/datasheet/rchip/PYu-RC_Group_51_RoHS_L_11.pdf, ID=r0017, Корпус=0603, Наименование=RC0603BR-0753K6L, Номинал="53,6 к", Номинальное напряжение="75 В", Номинальный ток="1 А", Описание="Резистор чип 0603 53,6 кОм ±0,1 % 0,1 Вт", Отклонение="±0,1 %", Производитель="YAGEO Corp.", Рабочие температуры="от -55 °С до +155 °С", Фамилия=Жернаков
R8: library part r0014, "=Описание", HelpURL=https://www.yageo.com/upload/media/product/productsearch/datasheet/rchip/PYu-RC_Group_51_RoHS_L_11.pdf, ID=r0014, Корпус=0603, Наименование=RC0603FR-0710K2L, Номинал="10,2 к", Номинальное напряжение="75 В", Номинальный ток="1 А", Описание="Резистор чип 0603 10,2 кОм ±1 % 0,1 Вт", Отклонение="±1 %", Производитель="YAGEO Corp.", Рабочие температуры="от -55 °С до +155 °С", Фамилия=Жернаков
R9: library part r0009, "=Описание", HelpURL=https://www.yageo.com/upload/media/product/productsearch/datasheet/rchip/PYu-RC_Group_51_RoHS_L_11.pdf, ID=r0009, Корпус=0603, Наименование=RC0603FR-07220RL, Номинал=220, Номинальное напряжение="75 В", Номинальный ток="1 А", Описание="Резистор чип 0603 220 Ом ±1 % 0,1 Вт", Отклонение="±1 %", Производитель="YAGEO Corp.", Рабочие температуры="от -55 °С до +155 °С", Фамилия=Ларионов
VD1: library part vd0028, "=Описание", HelpURL=https://www.vishay.com/product?docid=85161, ID=vd0028, Корпус=DO-219AB, Наименование=BZD17C47P, Номинальное напряжение стабилизации="47 В", Номинальный ток стабилизации="10 мА", Описание="Стабилитрон 47 В", Производитель="Vishay Intertechnology, Inc.", Рабочие температуры="от –55 °С до +150 °С", Разброс напряжения стабилизации="44,0...50,0 В", Фамилия=Паньков
VD2 VD4 VD5: library part vd0004, "=Описание", HelpURL=https://www.vishay.com/product?docid=88751, ID=vd0004, Импульсное обратное напряжение="60 В", Корпус=DO-214AB, Макс допустимый средний прямой ток="3 А", Наименование=SS36-E3/57T, Описание="Диод Шоттки 60 В 3 А", Пиковое прямое напряжение="0,75 В", Производитель="Vishay Intertechnology, Inc.", Рабочие температуры="от –55 °С до +150 °С", Фамилия=Жернаков
VD3: library part vd0016, "=Описание", HelpURL=https://www.vishay.com/product?docid=85161, ID=vd0016, Корпус=DO-219AB, Наименование=BZD17C15P, Номинальное напряжение стабилизации="15 В", Номинальный ток стабилизации="50 мА", Описание="Стабилитрон 15 В", Производитель="Vishay Intertechnology, Inc.", Рабочие температуры="от –55 °С до +150 °С", Разброс напряжения стабилизации="13,8...15,6 В", Фамилия=Жернаков
VT1: library part vt0001, "=Описание", HelpURL=https://www.ti.com/product/CSD19532Q5B, ID=vt0001, Корпус=SON-8, Наименование=CSD19532Q5B, Напряжение затвор — исток="±20 В", Напряжение сток — исток="100 В", Описание="Транзистор полевой N-канальный 100 В 17 А", Производитель="Texas Instruments", Рабочие температуры="от –55 °С до +150 °С", Сопротивление сток — исток="0,0057 Ом", Ток стока="17 А", Фамилия=Жернаков
X1: Package=None, Availability=Unavailable, Centerline_Pitch="2.54 mm[.1 in]", Contact_1=+48V, Contact_2=GND, EU_RoHS_Compliance=Compliant, MF="TE Connectivity", MP=826629-2, Number_of_Positions=2, Price=None, Product_Type=Connector, SnapEDA_Link=https://www.snapeda.com/parts/826629-2/TE%20Connectivity%20AMP%20Connectors/view-part/494607/?ref=snap, TE_purchase_URL=https://www.te.com/usa-en/product-826629-2.html?te_bu=Cor&te_type=disp&te_campaign=seda_glo_cor-seda-global-disp-prtnr-fy19-seda-model-bom-cta_sma-317_1&elqCampaignId=32493
X2: library part x0004, "=Описание", Contact_1=5V, Contact_2=5V, Contact_3=GND, Contact_4=GND, HelpURL=https://www.te.com/usa-en/product-4-1775099-0.html, ID=x0004, Наименование=4-1775099-0, Описание="ATX Power 4 pin гнездо прямой", Производитель="TE Connectivity", Фамилия=Ларионов

## Free pads (board coordinates)
  round 6.2 hole 2.7: 2(3.8,20.95) 2(59.4,3.7)

## Via types
v1: diameter 0.6, hole 0.3, Top Layer to Bottom Layer, tented both sides, 9 vias
v2: diameter 0.6, hole 0.3, Top Layer to Bottom Layer, tented bottom, 6 vias

## Nets (pads, with @x,y where several pads share a name; then routed paths per layer and width w, separated by ;. In a path a pad name is that pad's centre, name@x,y a point inside that pad or via, vN(x,y) a via of type N, cw(c..) or ccw(c..) an arc to the next point about the centre after c; other vN are vias at no path point)
+5V: C8.1 C9.1 C10.1 C11.1 L1.2 R7.2 R9.2 X2.1 X2.2 | length 35.9
  Top Layer w0.3: R7.2@44.05,3.75 44.025,3.75 43.75,3.475 43.75,3.45 43.8,3.4 45.824,3.4 46,3.576 46,5.7 47.9,7.6 50.7,7.6 ; R9.2@49.525,5 49.525,6.425 50.7,7.6 ; 60.8,22.3 61.3,21.8 61.3,12.9 56,7.6 50.7,7.6
+48V: C1.1 C2.1 C3.1 C4.1 DD1.2 R2.2 R3.2 VD1.1 VD2.1 X1.1 | length 7.2
  Top Layer w0.5: v1(23.05,7.95) 23.807,7.95 24.1,7.657 24.1,7.15 24.275,6.975 R3.2@24.3,6.975
  Bottom Layer w0.5: v1(23.05,7.95) 25.55,10.45 v1(25.55,12.2)
BOOT: C7.1 DD1.1 | length 2.2
  Top Layer w0.5: C7.1@27.3,15.95 27.3,13.88 27.325,13.855 DD1.1@27.425,13.855
FB: DD1.5 R7.1 R8.2 | length 13.6
  Top Layer w0.3: DD1.5@33.175,10.045 38.755,10.045 42.175,6.625 42.175,5.45 42.188,5.438 42.188,3.463 R7.1@42.2,3.45
GND: C8.2 C9.2 C10.2 C11.2 DD1.0 DD1.7 HL2.1 pad.2 R1.1 R8.1 VD1.2 VD4.1 VD5.2 VT1.D X1.2 X2.3 X2.4
  other v2: 29.55,10.95 31.05,10.95 29.55,11.95 31.05,11.95 29.55,12.95 31.05,12.95
NetC1_2: C1.2 C2.2 C3.2 C4.2 C5.2 C6.2 R4.1 R5.1 VT1.S | length 20.8
  Top Layer w0.5: v1(19.6,7.7) 19.619,7.681 20.344,7.681 21.025,7 R4.1@21.05,7 ; C3.2@21.05,9.225 C3.2@21.55,9.725 ; v1(27.55,4.2) 27.55,5.45 30.8,5.45 32.625,5.45 33.2,4.875 33.2,4.8
  Bottom Layer w0.5: v1(19.6,7.7) 19.627,7.7 20.052,7.275 23.975,7.275 v1(25,8.3) 25,6.75 v1(27.55,4.2)
NetC5_1: C5.1 DD1.6 R6.2 | length 7.4
  Top Layer w0.5: C5.1@30.8,6.85 30.875,6.925 32.95,6.925 33.025,7 32.975,7.05 v1(32.975,8.2)
  Bottom Layer w0.5: v1(32.975,8.2) 32.994,8.219 32.994,9.144 v1(35.05,11.2)
NetC6_1: C6.1 R6.1 | length 3.6
  Top Layer w0.5: R6.1@34.575,7 35.707,7 36,6.707 36,5.15 35.65,4.8
NetDD1_3: DD1.3 R3.1 R4.2 | length 11.7
  Top Layer w0.5: R4.2@21.05,5.45 21.062,5.438 24.287,5.438 24.3,5.425 25.625,5.425 25.975,5.775 25.975,10.665 26.625,11.315 DD1.3@27.425,11.315
NetDD1_4: DD1.4 R5.2 | length 3.1
  Top Layer w0.5: DD1.4@27.425,10.045 27.425,7.125 R5.2@27.55,7
NetHL1_1: HL1.1 VD2.2 | length 4.1
  Top Layer w0.5: VD2.2@11.8,17.9 12.55,18.65 HL1.1
NetHL1_2: HL1.2 R1.2 | length 2.2
  Top Layer w0.5: HL1.2 14.337,21.563 16.163,21.563 R1.2@16.3,21.425
NetHL2_2: HL2.2 R9.1 | length 1.9
  Top Layer w0.3: R9.1@51.05,5.05 51.1,5 HL2.2
NetR2_1: R2.1 VD3.1 VT1.G
NetVD3_2: VD3.2 VD4.2
SW: C7.2 DD1.8 L1.1 VD5.1 | length 14.1
  Top Layer w0.5: C7.2@27.3,17.35 v1(27.3,19.2)
  Bottom Layer w0.5: v1(27.3,19.2) 33.2,13.3 v1(37.1,13.3)

## Polygon pours and split planes (outlines as drawn)
GND on Top Layer (solid, pour order 86): 0,24.9 0,0 63,0 63,24.9
SW on Top Layer "TP_SW_02" (solid, pour order 78): 32.6,13.2 32.6,17.3 44.9,17.3 44.9,10.7 38.68,10.7 35.6,12.9 35.18,13.2
NetVD3_2 on Top Layer "TP_VD3_01" (solid, pour order 54): 6.05,5.95 12.05,5.95 12.05,2.95 11.55,2.45 6.05,2.45
+48V on Top Layer "TP_48V_01" (solid, pour order 50): 2,15.3 2,12.8 6.3,12.8 6.3,11.45 8.05,11.45 9.05,10.45 15.05,10.45 15.05,10.7 15.8,11.45 25.55,11.45 25.9,11.8 28.8,11.8 28.8,13.597 24.893,13.653 24.8,13.7 10.05,13.7 8.45,15.3
+5V on Top Layer "TP_5V_02" (solid, pour order 84): 46.1,10.9 50.7,10.9 52.5,10.9 52.5,20.3 62,20.3 62,24.5 61.8,24.7 49,24.7 49,16.1 47.3,16.1 46.1,15.2
NetC1_2 on Top Layer "TP_C1_03" (solid, pour order 68): 24.5,8.4 24.7,8.2 24.7,7.9 25.2,7.9 25.4,8.1 25.4,10.5 25.2,10.7 15.5,10.7 15.5,9.3 14.1,7.9 14.1,6.3 17.9,6.3 17.75,8.45 24.3,8.4
NetR2_1 on Top Layer "TP_R3_01" (solid, pour order 52): 14.05,6.7 11.3,6.95 9.3,6.95 6.3,9.95 6.3,10.95 7.8,10.95 9.55,9.2 9.55,8.7 14.05,8.7
NetC5_1 on Top Layer "TP_C5_01" (solid, pour order 60): 31.7,12 31.7,10.6 35.8,10.6 35.8,12
no net on Top Layer "Top Layer-No Net" (solid, pour order 70): 20.1,6.6
no net on Top Layer "Top Layer-No Net 1" (solid, pour order 64): 44.55,21.95
no net on Top Layer "Top Layer-No Net 2" (solid, pour order 36): 32.2,13.7
GND on Signal Layer 1 "SL_GND" (solid, pour order 28): 0,24.725 0,1.1 0,0.054 63,0 63,24.725 55.675,24.725
GND on Signal Layer 2 "SL_2_GND" (solid, pour order 30): 0.425,24.65 0,24.225 0,0 63,0 63,24.65
GND on Bottom Layer "BL_GND" (solid, pour order 32): 0.125,24.6 0.125,0 63,0 63,24.685

## Silkscreen, mask and mechanical layers (free items; w line width, h text height)
Top Overlay:
  text "ERR" at 11.8,22.7 h1.2
  text "48V-5V 1A" at 18.6,21.1 h3
  text "Buck" at 18.9,17.3 h3
  text "48V" at 0.4,15.4 h2 r270
  text "GND" at 0.3,12.5 h2 r270
  text ".designation" at 20.3,1.1 h2
  text "OK" at 48.7,0.8 h1.2
Bottom Overlay:
  text "5V" at 62.3,22.9 h2 r90
  text "GND" at 62.4,18.3 h2 r90
Board:
  the board outline again, w0.254
Assembly Notes (Mech5):
  text "'.title'" at 0.3,-1.8 h2
  text "'.project'_'.pcb_dec_number'['.Pcb_File_Name_No_Path']" at 0.3,-4.3 h2